# EAGLE board EXCISS HVU trigger (EAGLE 7.7.0)
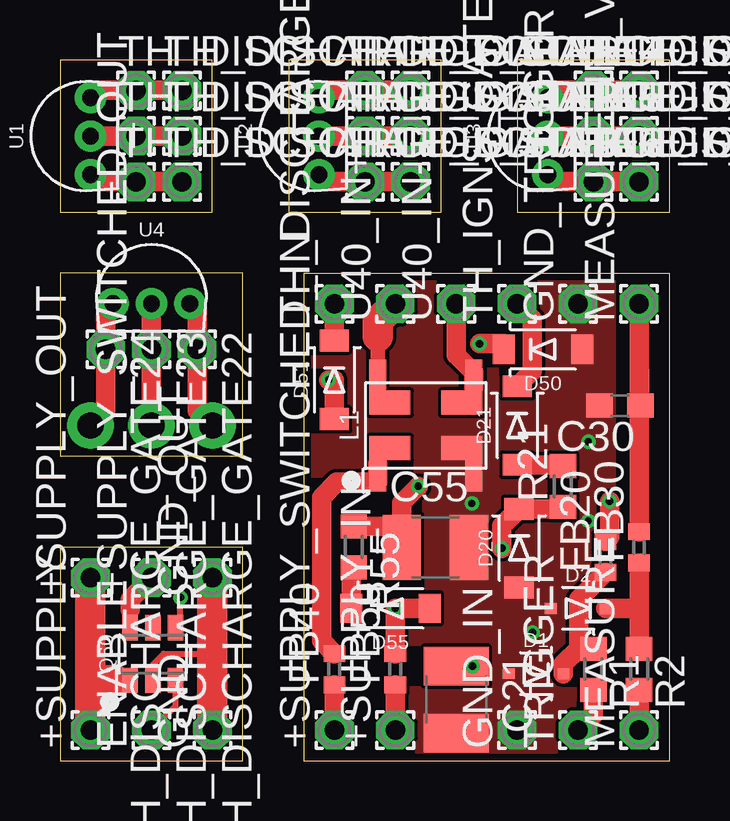
[diagram p0: board, top side]
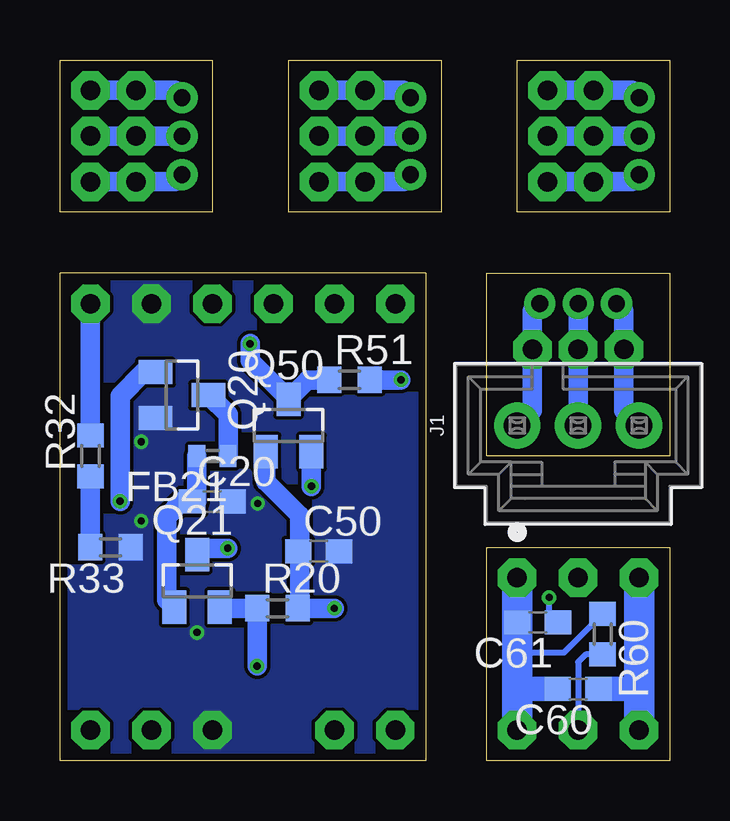
[diagram p1: board, bottom side, seen from below]

Size 25.4 x 29.21 mm. Coordinates in mm from the lower left corner, seen from the top.
Outline: 7.62,0 7.62,8.89 0,8.89 0,0 7.62,0
Outline: 25.4,0 25.4,20.32 10.16,20.32 10.16,0 25.4,0
Outline: 0,22.86 6.35,22.86 6.35,29.21 0,29.21 0,22.86
Outline: 9.53,22.86 15.88,22.86 15.88,29.21 9.53,29.21 9.53,22.86
Outline: 19.05,22.86 25.4,22.86 25.4,29.21 19.05,29.21 19.05,22.86
Outline: 0,20.32 0,12.7 7.62,12.7 7.62,20.32 0,20.32
Copper layers (1*16): Top 0.035mm / dielectric 1.5mm / Bottom 0.035mm
Design rules "PCB-POOL Standard": minimum track width 0.15mm, minimum drill 0.3mm, track to track 0.15mm, track to pad 0.15mm, pad to pad 0.15mm, via to via 0.15mm, smd to smd 0.15mm, copper to edge 0.3mm, drill to drill 0.2mm, minimum pad ring 0.2mm, minimum via ring 0.15mm, stop-mask expansion 0.075mm, vias tented up to drill 0.3mm, thermal gap 0.2mm

## Footprints (pad centres in the part's own frame; a part is rotated, then mirrored left to right if it is on the bottom)
1,6/0,8 = drill 0.813 pad 1.6 octagon: 1 0,0
C0603 = smd 1.1 x 1: 1 -0.85,0; 2 0.85,0
C1210 = smd 1.6 x 2.7: 1 -1.4,0; 2 1.4,0
SOD-323 = smd 0.49 x 0.45: A -1.14,0; C 1.14,0
SOD-123FL = smd 0.91 x 1.22: A -1.637,0; C 1.637,0
0402 = smd 0.7 x 0.9: 1 -0.65,0; 2 0.65,0
MOLEX_70543-0002 = drill 1.1 pad 1.93: 1 0,0; 2 0,-2.54; 3 0,-5.08
DLW5AT = smd 2.3 x 0.7: 1A -1.6,2; 2A 1.6,2; 3A 1.6,-2; 4A -1.6,-2 | smd 1 x 1.7: 1B+ -0.945,1.495; 2B 0.955,1.495; 3B 0.955,-1.505; 4B -0.945,-1.505
SOT23-3 = smd 1 x 1.4: 1 -0.95,-1.1; 2 0.95,-1.1; 3 0,1.1
SOT23-6_DBV = smd 1.06 x 0.65: 1 -1.1,0.95; 2 -1.1,0; 3 -1.1,-0.95; 4 1.1,-0.95; 5 1.1,0; 6 1.1,0.95
R0603 = smd 1 x 1.1: 1 -0.85,0; 2 0.85,0
TO-92-STRAIGHT = drill 0.7 pad 1.3: 1 -1.6,0; 2 0,0; 3 1.6,0

## Placement (x,y rotation side)
+SUPPLY  WIREPAD1,6/0,8  [1,6/0,8]  1.27,1.27 90 top
+SUPPLY_IN  WIREPAD1,6/0,8  [1,6/0,8]  13.97,1.27 90 top
+SUPPLY_OUT  WIREPAD1,6/0,8  [1,6/0,8]  1.27,7.62 90 top
+SUPPLY_SWITCHED_IN  WIREPAD1,6/0,8  [1,6/0,8]  11.43,1.27 90 top
+SUPPLY_SWITCHED_OUT  WIREPAD1,6/0,8  [1,6/0,8]  3.81,7.62 90 top
C20  2,2nF  [C0603]  19.05,10.79 0 bottom
C21  47µF  [C1210]  16.51,2.54 270 top
C30  2,2nF  [C0603]  23.33,14.8 180 top
C50  2,2nF  [C0603]  14.62,8.73 0 bottom
C55  47µF  [C1210]  15.64,8.89 0 top
C60  1µF  [C0603]  3.81,2.99 180 bottom
C61  10nF  [C0603]  5.5,5.77 180 bottom
D1  SP4020-01FTG  [SOD-323]  19.84,3.62 0 top
D2  SP4020-01FTG  [SOD-323]  21.59,6.35 0 top
D20  SL1M  [SOD-123FL]  19.13,8.86 90 top
D21  SL1M  [SOD-123FL]  19.05,13.97 90 top
D50  SL1M  [SOD-123FL]  20.12,17.14 180 top
D51  SL1M  [SOD-123FL]  11.43,15.88 90 top
D55  SL1M  [SOD-123FL]  13.77,6.35 180 top
ENABLE  WIREPAD1,6/0,8  [1,6/0,8]  3.81,1.27 90 top
FB20  BLM18PG471SN1D  [0402]  22.73,8.49 90 top
FB21  BLM18PG471SN1D  [0402]  19.05,12.7 180 bottom
FB30  BLM18PG471SN1D  [0402]  24.13,8.89 90 top
FB40  BLM18PG471SN1D  [0402]  11.43,3.81 90 top
FB50  BLM18PG471SN1D  [0402]  13.97,3.81 90 top
GND  WIREPAD1,6/0,8  [1,6/0,8]  6.35,1.27 90 top
GND_IN  WIREPAD1,6/0,8  [1,6/0,8]  19.05,1.27 90 top
GND_OUT  WIREPAD1,6/0,8  [1,6/0,8]  6.35,7.62 90 top
GND_TRIGGER  WIREPAD1,6/0,8  [1,6/0,8]  21.59,19.05 90 top
J1  70543-0002  [MOLEX_70543-0002]  6.35,13.97 90 bottom
L1  DLW5ATN272SQ2  [DLW5AT]  15.24,13.97 90 top
MEASURE  WIREPAD1,6/0,8  [1,6/0,8]  24.13,1.27 90 top
MEASURE_IN_VD  WIREPAD1,6/0,8  [1,6/0,8]  24.13,19.05 90 top
Q20  PDTC143ZT  [SOT23-3]  20.32,15.24 270 bottom
Q21  PDTB123TT  [SOT23-3]  19.68,7.49 0 bottom
Q50  PDTB123TT  [SOT23-3]  15.88,13.97 0 bottom
Q60  TPS22810DBV  [SOT23-6_DBV]  3.87,4.45 90 top
R1  100R  [R0603]  22.23,3.81 270 top
R2  100R  [R0603]  24.13,3.81 270 top
R20  4,7K  [R0603]  16.34,6.35 0 bottom
R21  180R  [R0603]  20.95,11.43 90 top
R32  22K  [R0603]  24.13,12.7 90 bottom
R33  3,9K  [R0603]  23.3,8.89 180 bottom
R51  180R  [R0603]  13.34,15.88 0 bottom
R55  4,7K  [R0603]  12.24,8.91 270 top
R60  10K  [R0603]  2.79,5.27 270 bottom
TH_DISCHARGE_GATE  WIREPAD1,6/0,8  [1,6/0,8]  11.43,19.05 90 top
TH_DISCHARGE_GATE1  WIREPAD1,6/0,8  [1,6/0,8]  3.17,27.94 0 top
TH_DISCHARGE_GATE2  WIREPAD1,6/0,8  [1,6/0,8]  3.17,26.04 0 top
TH_DISCHARGE_GATE3  WIREPAD1,6/0,8  [1,6/0,8]  3.17,24.13 0 top
TH_DISCHARGE_GATE4  WIREPAD1,6/0,8  [1,6/0,8]  5.08,27.94 0 top
TH_DISCHARGE_GATE5  WIREPAD1,6/0,8  [1,6/0,8]  5.08,26.04 0 top
TH_DISCHARGE_GATE6  WIREPAD1,6/0,8  [1,6/0,8]  5.08,24.13 0 top
TH_DISCHARGE_GATE7  WIREPAD1,6/0,8  [1,6/0,8]  12.7,27.94 0 top
TH_DISCHARGE_GATE8  WIREPAD1,6/0,8  [1,6/0,8]  12.7,26.04 0 top
TH_DISCHARGE_GATE9  WIREPAD1,6/0,8  [1,6/0,8]  12.7,24.13 0 top
TH_DISCHARGE_GATE10  WIREPAD1,6/0,8  [1,6/0,8]  14.61,27.94 0 top
TH_DISCHARGE_GATE11  WIREPAD1,6/0,8  [1,6/0,8]  14.61,26.04 0 top
TH_DISCHARGE_GATE12  WIREPAD1,6/0,8  [1,6/0,8]  14.61,24.13 0 top
TH_DISCHARGE_GATE13  WIREPAD1,6/0,8  [1,6/0,8]  24.13,27.94 0 top
TH_DISCHARGE_GATE14  WIREPAD1,6/0,8  [1,6/0,8]  24.13,26.04 0 top
TH_DISCHARGE_GATE15  WIREPAD1,6/0,8  [1,6/0,8]  24.13,24.13 0 top
TH_DISCHARGE_GATE16  WIREPAD1,6/0,8  [1,6/0,8]  22.23,27.94 0 top
TH_DISCHARGE_GATE17  WIREPAD1,6/0,8  [1,6/0,8]  22.23,26.04 0 top
TH_DISCHARGE_GATE18  WIREPAD1,6/0,8  [1,6/0,8]  22.23,24.13 0 top
TH_DISCHARGE_GATE22  WIREPAD1,6/0,8  [1,6/0,8]  5.71,17.14 270 top
TH_DISCHARGE_GATE23  WIREPAD1,6/0,8  [1,6/0,8]  3.81,17.14 270 top
TH_DISCHARGE_GATE24  WIREPAD1,6/0,8  [1,6/0,8]  1.91,17.14 270 top
TH_IGNS_GATE  WIREPAD1,6/0,8  [1,6/0,8]  19.05,19.05 90 top
TRIGGER  WIREPAD1,6/0,8  [1,6/0,8]  21.59,1.27 90 top
U1  DS18B20+  [TO-92-STRAIGHT]  1.27,26.04 90 top
U2  DS18B20+  [TO-92-STRAIGHT]  10.79,26.04 90 top
U3  DS18B20+  [TO-92-STRAIGHT]  20.32,26.04 90 top
U4  DS18B20+  [TO-92-STRAIGHT]  3.81,19.05 0 top
U40_IN+  WIREPAD1,6/0,8  [1,6/0,8]  13.97,19.05 90 top
U40_IN-  WIREPAD1,6/0,8  [1,6/0,8]  16.51,19.05 90 top

## Library data of the parts
+SUPPLY +SUPPLY_IN +SUPPLY_OUT +SUPPLY_SWITCHED_IN +SUPPLY_SWITCHED_OUT ENABLE GND GND_IN GND_OUT GND_TRIGGER MEASURE MEASURE_IN_VD TH_DISCHARGE_GATE TH_DISCHARGE_GATE1-TH_DISCHARGE_GATE18 TH_DISCHARGE_GATE22-TH_DISCHARGE_GATE24 TH_IGNS_GATE TRIGGER U40_IN+ U40_IN- = wirepad
C20 C21 C30 C50 C55 C60 C61 R1 R2 R20 R21 R32 R33 R51 R55 R60 = rcl
D1 D2 = exciss; OC_MOUSER: 576-SP4020-01FTG
D20 D21 D50 D51 D55 = exciss; OC_CONRAD: 556838 - 62
FB20 FB21 FB30 FB40 FB50 = inductors
J1 = exciss; OC_MOUSER: 538-70543-0003
L1 = exciss; OC_MOUSER: 81-DLW5ATN272SQ2L
Q20 = exciss; R1: 4K7; R2: 47K
Q21 Q50 = exciss; R1: 2K2; R2: open
Q60 = exciss; OC_MOUSER: 595-TPS22810DBV
U1-U4 = exciss; OC_MOUSER: 700-DS18B20+

## Nets
+HVU_SUPPLY_SWITCHED_FB: FB40.2 L1.1A L1.1B+
+SUPPLY: +SUPPLY_IN.1 FB50.1
+SUPPLY$1: +SUPPLY.1 +SUPPLY_OUT.1 C60.1 Q60.1
+SUPPLY_FB: C50.1 D55.A FB50.2 Q50.1 R20.2
+SUPPLY_SWITCHED: +SUPPLY_SWITCHED_IN.1 FB40.1
+SUPPLY_SWITCHED$1: +SUPPLY_SWITCHED_OUT.1 Q60.6
AGND: C20.2 C21.2 C30.2 C50.2 C55.2 D1.A D2.A D20.A D50.A GND_IN.1 GND_TRIGGER.1 L1.4A L1.4B Q20.2 R33.1
ENABLE: ENABLE.1 Q60.3 R60.2
GND: C60.2 C61.2 GND.1 GND_OUT.1 Q60.2 R60.1
MEASURE: D2.C FB30.1 R2.1
MEASURE_FB: C30.1 FB30.2 MEASURE_IN_VD.1 R32.2
N$1: MEASURE.1 R2.2
N$2: D20.C Q21.3 R21.1
N$3: D21.C TH_IGNS_GATE.1
N$4: R32.1 R33.2
N$5: R1.2 TRIGGER.1
N$6: TH_DISCHARGE_GATE1.1 TH_DISCHARGE_GATE4.1 U1.3
N$7: C21.1 Q21.2 R20.1
N$8: TH_DISCHARGE_GATE2.1 TH_DISCHARGE_GATE5.1 U1.2
N$9: D21.A R21.2
N$10: TH_DISCHARGE_GATE3.1 TH_DISCHARGE_GATE6.1 U1.1
N$11: L1.3A L1.3B U40_IN-.1
N$12: TH_DISCHARGE_GATE7.1 TH_DISCHARGE_GATE10.1 U2.3
N$13: C20.1 FB21.2 Q21.1
N$14: C61.1 Q60.4
N$15: D51.C TH_DISCHARGE_GATE.1
N$16: TH_DISCHARGE_GATE8.1 TH_DISCHARGE_GATE11.1 U2.2
N$17: TH_DISCHARGE_GATE9.1 TH_DISCHARGE_GATE12.1 U2.1
N$18: FB21.1 Q20.3
N$19: TH_DISCHARGE_GATE13.1 TH_DISCHARGE_GATE16.1 U3.3
N$20: D51.A R51.2
N$21: L1.2A L1.2B U40_IN+.1
N$22: TH_DISCHARGE_GATE14.1 TH_DISCHARGE_GATE17.1 U3.2
N$23: D50.C Q50.3 R51.1
N$24: C55.1 Q50.2 R55.1
N$25: D55.C R55.2
N$26: TH_DISCHARGE_GATE15.1 TH_DISCHARGE_GATE18.1 U3.1
N$27: J1.1 TH_DISCHARGE_GATE22.1 U4.3
N$28: J1.2 TH_DISCHARGE_GATE23.1 U4.2
N$29: J1.3 TH_DISCHARGE_GATE24.1 U4.1
TRIGGER: D1.C FB20.1 R1.1
TRIGGER_FB: FB20.2 Q20.1

## Tracks (layer width: path | path; a pad name or v marks a point on that pad's centre or on a via)
+HVU_SUPPLY_SWITCHED_FB
  Top 0.813: FB40.2 10.9,4.99 10.9,10.97 11.54,11.61 13.24,11.61 L1.1A
+SUPPLY
  Top 0.813: FB50.1 +SUPPLY_IN.1
+SUPPLY$1
  Top 0.61: Q60.1 2.32,3.35
  Top 1.016: 1.27,1.79 +SUPPLY.1
  Top 1.27: +SUPPLY.1 1.27,3.81 | 1.27,3.81 +SUPPLY_OUT.1 | 2.32,3.35 1.58,3.35 1.27,3.81
  Bottom 1.016: C60.1 1.27,2.99
  Bottom 1.27: +SUPPLY_OUT.1 1.27,2.99 +SUPPLY.1
+SUPPLY_FB  (via drill 0.3)
  Top 0.813: FB50.2 v13.97,6.35 D55.A
  Bottom 0.813: R20.2 D55.A | D55.A v13.97,6.35 | C50.1 15.41,8.89 | 15.41,8.89 D55.A | Q50.1 16.82,11.63 15.41,10.22 15.41,8.89
+SUPPLY_SWITCHED
  Top 0.813: +SUPPLY_SWITCHED_IN.1 FB40.1
+SUPPLY_SWITCHED$1
  Top 0.61: 2.92,6.3 Q60.6
  Top 0.813: +SUPPLY_SWITCHED_OUT.1 2.92,6.73 2.92,6.3
AGND  (via drill 0.3)
  other vias: 17.16,10.72 22.02,9.99 22.02,13.29 19.69,5.34
  pour Bottom (no thermals): 25.4,20.32 25.4,0 10.16,0 10.16,20.32
  pour Top (no thermals): 22.86,0 22.86,20.32 10.16,20.32 10.16,0
ENABLE
  Top 0.254: ENABLE.1 4.82,2.28 Q60.3
  Bottom 0.254: R60.2 3.5,4.42 3.81,4.11 ENABLE.1
GND
  Top 0.254: Q60.2 3.87,4 4.32,4.45 6.02,4.45 6.35,4.48
  Top 1.016: 6.35,1.79 6.35,2.54
  Top 1.27: GND.1 6.35,2.54 6.35,4.48 GND_OUT.1
  Bottom 0.254: 6.26,4.99 6.35,5.08 6.35,6.02 | R60.1 4.41,4.5 6.35,4.5
  Bottom 1.016: C60.2 6.35,2.99
  Bottom 1.27: GND.1 6.35,2.99 6.35,4.5 6.35,5.08 C61.2 GND_OUT.1
MEASURE
  Top 0.813: R2.1 24.13,6.35 | 24.13,6.35 FB30.1 | D2.C 24.13,6.35
MEASURE_FB
  Top 0.813: MEASURE_IN_VD.1 24.13,16.86 | 24.13,16.86 C30.1 | FB30.2 24.13,16.86
  Bottom 0.813: R32.2 MEASURE_IN_VD.1
N$1
  Top 0.813: MEASURE.1 R2.2
N$2  (via drill 0.3)
  Top 0.813: R21.1 20.95,10.5 D20.C 18.41,9.78 v18.41,8.86
  Bottom 0.813: Q21.3 19.68,8.86 v18.41,8.86
N$3
  Top 0.813: TH_IGNS_GATE.1 19.68,18.41 19.68,16.24 D21.C
N$4
  Bottom 0.813: R32.1 24.13,9.11 R33.2
N$5
  Top 0.813: TRIGGER.1 22.23,1.91 R1.2
N$6
  Top 0.813: U1.3 1.57,27.94 TH_DISCHARGE_GATE1.1 TH_DISCHARGE_GATE4.1
  Bottom 0.813: U1.3 1.57,27.94 TH_DISCHARGE_GATE4.1
N$7  (via drill 0.3)
  Top 0.813: C21.1 v17.19,3.94
  Bottom 0.813: v17.19,3.94 R20.1 18.73,6.35 Q21.2
N$8
  Top 0.813: U1.2 TH_DISCHARGE_GATE2.1 TH_DISCHARGE_GATE5.1
  Bottom 0.813: U1.2 TH_DISCHARGE_GATE5.1
N$9
  Top 0.813: R21.2 20.95,12.33 D21.A
N$10
  Top 0.813: U1.1 1.57,24.13 TH_DISCHARGE_GATE3.1 TH_DISCHARGE_GATE6.1
  Bottom 0.813: U1.1 1.57,24.13 TH_DISCHARGE_GATE6.1
N$11
  Top 0.813: L1.3A 17.24,16.21 17.21,16.21 16.51,16.91 U40_IN-.1
N$12
  Top 0.813: U2.3 11.1,27.94 TH_DISCHARGE_GATE7.1 TH_DISCHARGE_GATE10.1
  Bottom 0.813: U2.3 11.1,27.94 TH_DISCHARGE_GATE10.1
N$13
  Bottom 0.813: Q21.1 20.95,6.71 20.95,10.16 20.32,10.79 C20.1 19.7,10.79 FB21.2
N$14  (via drill 0.3)
  Top 0.254: Q60.4 5.02,5.92 v5.02,6.8
  Bottom 0.254: C61.1 5.02,6.14 v5.02,6.8
N$15
  Top 0.813: D51.C TH_DISCHARGE_GATE.1
N$16
  Top 0.813: U2.2 TH_DISCHARGE_GATE8.1 TH_DISCHARGE_GATE11.1
  Bottom 0.813: U2.2 TH_DISCHARGE_GATE11.1
N$17
  Top 0.813: U2.1 11.1,24.13 TH_DISCHARGE_GATE9.1 TH_DISCHARGE_GATE12.1
  Bottom 0.813: U2.1 11.1,24.13 TH_DISCHARGE_GATE12.1
N$18
  Bottom 0.813: Q20.3 18.4,14.42 FB21.1
N$19
  Top 0.813: U3.3 20.62,27.94 TH_DISCHARGE_GATE16.1 TH_DISCHARGE_GATE13.1
  Bottom 0.813: U3.3 20.62,27.94 TH_DISCHARGE_GATE13.1
N$20  (via drill 0.3)
  Top 0.813: v11.2,15.88 11.43,15.88 D51.A
  Bottom 0.813: R51.2 v11.2,15.88
N$21
  Top 0.61: L1.2A 13.24,17.68
  Top 1.27: U40_IN+.1 13.24,18.32 13.24,17.68
N$22
  Top 0.813: U3.2 TH_DISCHARGE_GATE17.1 TH_DISCHARGE_GATE14.1
  Bottom 0.813: U3.2 TH_DISCHARGE_GATE14.1
N$23  (via drill 0.3)
  Top 0.813: v17.48,17.38 18.48,17.38 D50.C
  Bottom 0.813: R51.1 15.07,15.88 Q50.3 17.48,16.68 v17.48,17.38
N$24  (via drill 0.3)
  Top 0.813: R55.1 14.24,9.76 C55.1 14.24,10.75 v14.93,11.44
  Bottom 0.813: Q50.2 v14.93,11.44
N$25
  Top 0.813: D55.C 12.13,8.06 R55.2
N$26
  Top 0.813: U3.1 20.62,24.13 TH_DISCHARGE_GATE18.1 TH_DISCHARGE_GATE15.1
  Bottom 0.813: U3.1 20.62,24.13 TH_DISCHARGE_GATE15.1
N$27
  Top 0.813: U4.3 5.71,18.75 TH_DISCHARGE_GATE22.1 5.71,14.61 J1.1
  Bottom 0.813: U4.3 5.71,18.75 TH_DISCHARGE_GATE22.1 5.71,14.61 J1.1
N$28
  Top 0.813: U4.2 TH_DISCHARGE_GATE23.1 J1.2
  Bottom 0.813: U4.2 TH_DISCHARGE_GATE23.1 J1.2
N$29
  Top 0.813: U4.1 1.91,18.75 TH_DISCHARGE_GATE24.1 1.91,14.61 J1.3
  Bottom 0.813: U4.1 1.91,18.75 TH_DISCHARGE_GATE24.1 1.91,14.61 J1.3
TRIGGER
  Top 0.813: D1.C 20.98,4.03 21.61,4.66 | 21.61,4.66 R1.1 | FB20.1 21.61,6.72 21.61,4.66
TRIGGER_FB  (via drill 0.3)
  Top 0.813: FB20.2 22.9,9.31 v22.9,10.81
  Bottom 0.813: Q20.1 21.91,16.19 22.9,15.2 v22.9,10.81